# Altium PCB PCB2.PcbDoc
Units mil, origin at the board's own origin, x right, y up, seen from the top; angles counter-clockwise.
Board outline 1745 x 1445 mil, 2 copper layers (Top Layer, Bottom Layer); 19 components, 14 nets, 73 pads, 16 vias.
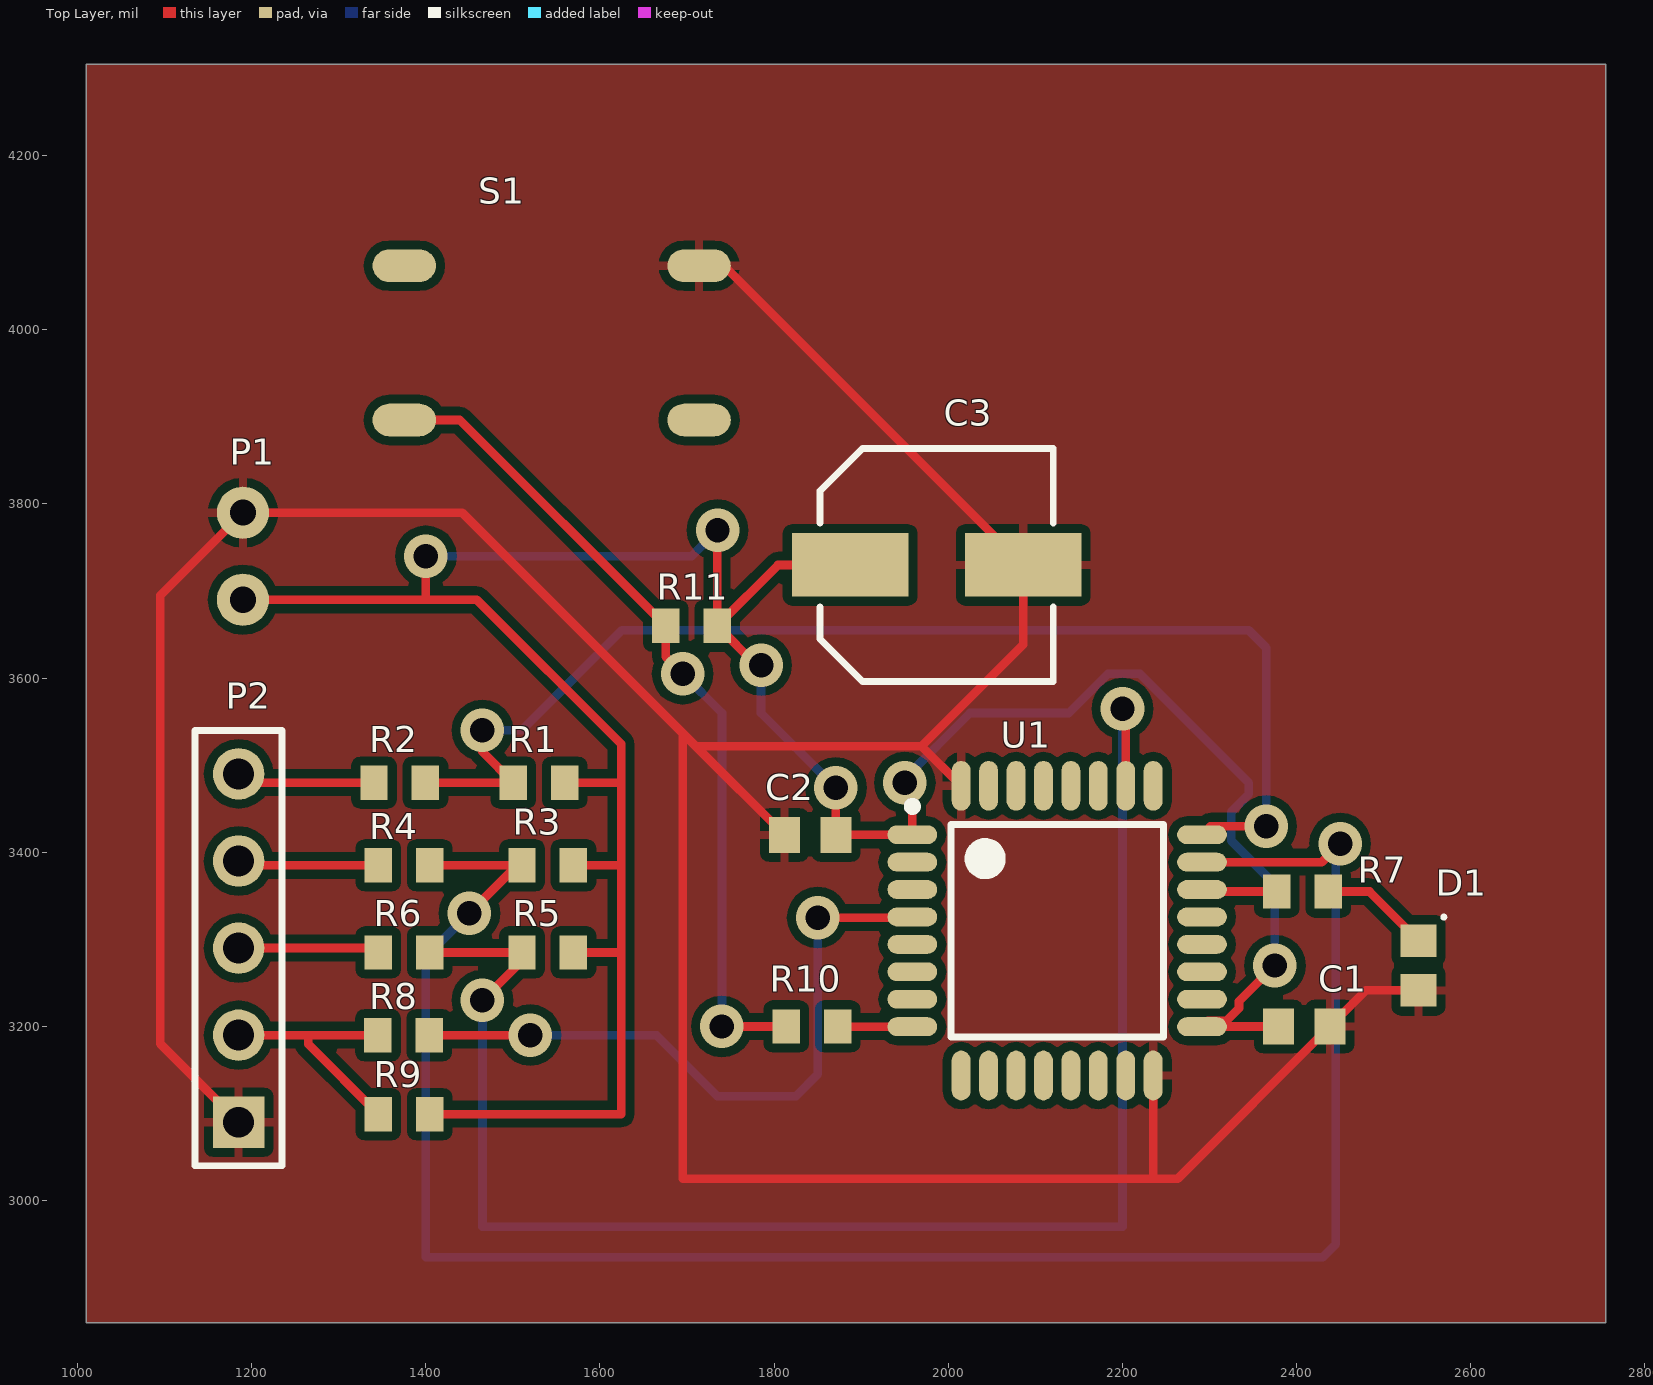
[diagram p0: Top Layer view]
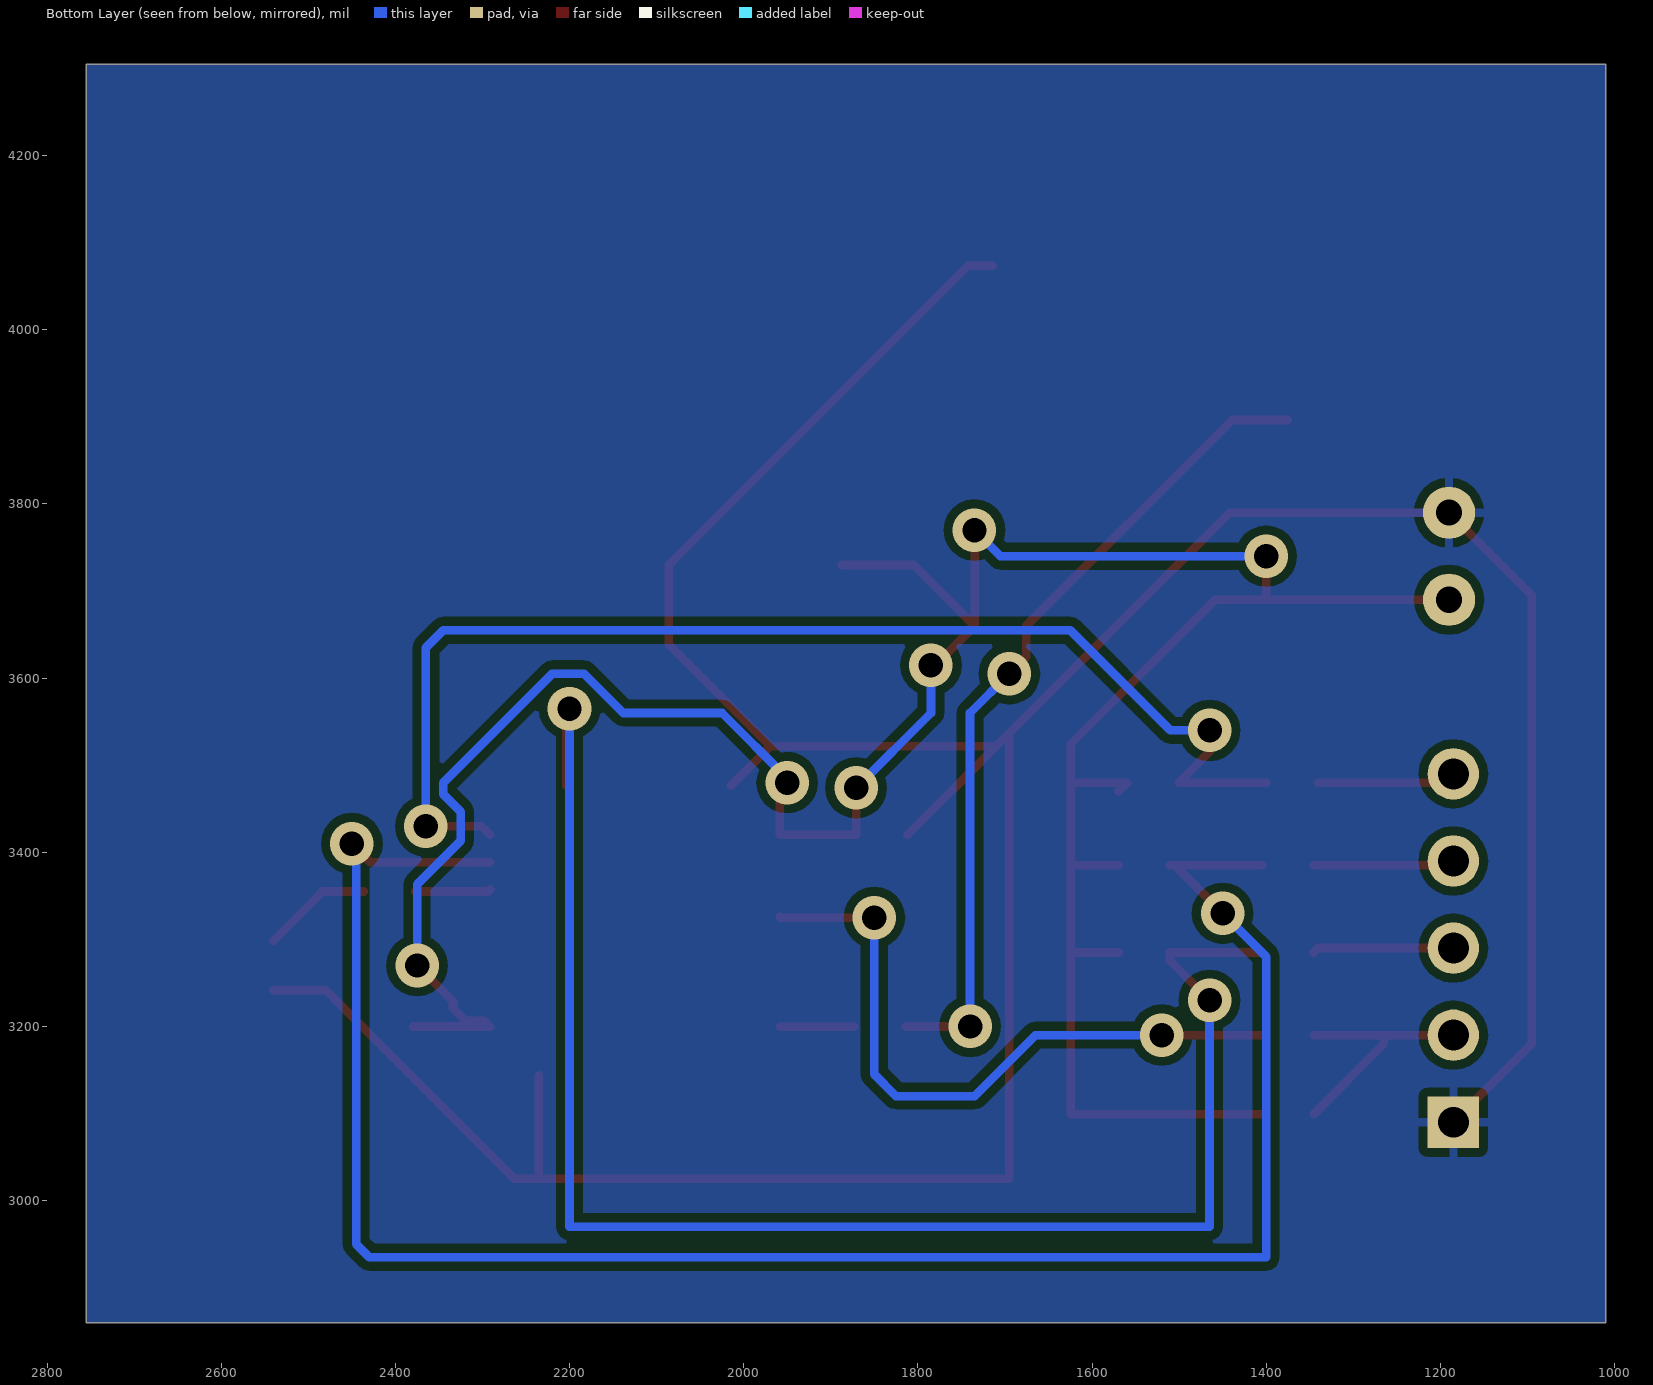
[diagram p1: Bottom Layer view, seen from below]

## Layer stack, top to bottom
Top Solder: solder mask 0.4, Solder Resist, Dk 3.5
Top Layer: signal copper 1.4
Dielectric 1: dielectric 12.6, FR-4, Dk 4.8
Bottom Layer: signal copper 1.4
Bottom Solder: solder mask 0.4, Solder Resist, Dk 3.5

## Board outline
1010,2860 1010,4305 2755,4305 2755,2860

## Design rules (kind name [scope] priority, off if disabled: settings)
Clearance [All] p1: gap=10 ignorepadtopadclearanceinfootprint=FALSE except(0: Arc-Hole Track-Hole SMDPad-Hole THPad-Hole Via-Hole Fill-Hole Poly-Hole Region-Hole Text-Hole; 9: Arc-SMDPad Track-SMDPad SMDPad-SMDPad)
PolygonConnect [All] p1: connectstyle=Relief reliefconductorwidth=10 reliefentries=4 polygonreliefangle="90 Angle" airgapwidth=10
RoomDefinition Sheet2 [InComponentClass('Sheet2')] p1: confinementstyle=ConfineOut formatcopy=TRUE lockcomponents=FALSE outline 0,0 2000,0 2000,1000 0,1000
RoutingVias [All] p1: holewidth=28 width=50 viastyle="Through Hole" minholewidth=28 minwidth=50 maxholewidth=28 maxwidth=50
SolderMaskExpansion [All] p1: expansion=4
Width [All] p1: maxlimit=10 minlimit=10 preferedwidth=10
30 further rules are at their usual default settings.

## Components (designator, comment, footprint, x,y, rotation, side; value= is the part's Value field where it differs from the comment)
C1 "100nF" capacitor0603nopolar 2408.63,3200 r180 top
C2 "100nF" capacitor0603nopolar 1841.37,3420 r0 top
C3 "Cap 10uF" cappolar_CM1H106M6L006VR 1986.66,3730 r0 top
D1 "LED-YEL-GRN" diode0603 2540,3270 r270 top
P1 "Header 2" header2,54 1190,3690 r0 top
P2 "Header 5" HDR1X5 1185,3090 r90 top
R1 "10kΩ" resistor0603 1530,3480 r0 top
R2 "100Ω" resistor0603 1370,3480 r0 top
R3 "10kΩ" resistor0603 1540,3385 r0 top
R4 "100Ω" resistor0603 1375,3385 r0 top
R5 "10kΩ" resistor0603 1540,3285 r0 top
R6 "100Ω" resistor0603 1375,3285 r0 top
R7 "604Ω" resistor0603 2406.66,3355 r0 top
R8 "100Ω" resistor0603 1374.53,3190 r0 top
R9 "10kΩ" resistor0603 1375,3099.28 r0 top
R10 "100Ω" resistor0603 1843.34,3200 r0 top
R11 "10kΩ" resistor0603 1705,3660 r0 top
S1 "SW-SPST" switch 1544.57,3985 r180 top
U1 "STM32F303K8T6" STM32F303K8T6 2125,3310 r0 top

## Footprints (in the part's own frame and the unit in brackets; to place one, negate y for a bottom-side part, rotate by r counter-clockwise, add the part's x,y. Pads: shape width x height; smd on the part's side, far side on the other; paste and mask are expansions set on the pad)
capacitor0603nopolar [mm]
  rect 0.9x1.05 smd: 1(-0.75,0) 2(0.75,0)
  body extent -0.85,-0.45 0.85,0.45, height 0.87
cappolar_CM1H106M6L006VR [mm]
  rect 3.4x1.85 smd: 1(-2.525,0) 2(2.525,0)
  silkscreen extent -3.4,-3.4 3.4,3.4, body extent -3.4,-3.4 3.4,3.4, height 6.3
diode0603 [mm]
  rect 0.95x1.05 smd: 1(-0.725,0) 2(0.725,0)
  silkscreen extent -1.46,0.69 -1.36,0.79, body extent -0.9,-0.45 0.9,0.45, height 1
HDR1X5 [mm] "Connector; Header; 5 Position"
  rect 1.5x1.5 hole 0.9: 1(0,0)
  round 1.5 hole 0.9: 2(2.54,0) 3(5.08,0) 4(7.62,0) 5(10.16,0)
  silkscreen extent -1.27,-1.27 11.43,1.27
header2,54 [mil]
  round 60 hole 30: 1(0,100) 2(0,0)
resistor0603 [mm]
  rect 0.8x1 smd: 1(-0.75,0) 2(0.75,0)
  body extent -0.85,-0.45 0.85,0.45, height 0.6
STM32F303K8T6 [mm] "TQFP, 32-Leads, Body 7,00x7,00mm, Pitch 0,80mm, IPC Medium Density"
  oval 1.45x0.55 smd: 1(-4.225,2.8) 2(-4.225,2) 3(-4.225,1.2) 4(-4.225,0.4) 5(-4.225,-0.4) 6(-4.225,-1.2) 7(-4.225,-2) 8(-4.225,-2.8) 17(4.225,-2.8) 18(4.225,-2) 19(4.225,-1.2) 20(4.225,-0.4) 21(4.225,0.4) 22(4.225,1.2) 23(4.225,2) 24(4.225,2.8)
  oval 0.55x1.45 smd: 9(-2.8,-4.225) 10(-2,-4.225) 11(-1.2,-4.225) 12(-0.4,-4.225) 13(0.4,-4.225) 14(1.2,-4.225) 15(2,-4.225) 16(2.8,-4.225) 25(2.8,4.225) 26(2,4.225) 27(1.2,4.225) 28(0.4,4.225) 29(-0.4,4.225) 30(-1.2,4.225) 31(-2,4.225) 32(-2.8,4.225)
  silkscreen extent -4.35,-3.1 3.1,3.75, body extent -3.5,-3.5 3.5,3.5, height 1.6
switch [mm]
  oval 1.85x0.95 smd: 1(-4.3,2.25) 2(-4.3,-2.25) 3(4.3,-2.25) 4(4.3,2.25)
  body extent -3.25,-3.25 3.25,3.25, height 4.6

## Part data
C1 C2: library part "Cap 100nF", "Capacitor", Manufacturer=WALSIN, Manufacturer symbol=0603B104K101CT, Package=0603, Temperature=-55...125°C, Tolerance=±10%, Voltage=100V, Supplier=tme.pl, Supplier symbol=0603B104K101CT
C3: "Capacitor", Capacity=10µF, Manufacturer=SAMWHA, Manufacturer symbol=CM1H106M6L006VR, Temperature=-55...105°C, Tolerance=±20%, Voltage=50V, Size=O6,3x5,8mm, Supplier=tme.pl, Supplier symbol=CM1H106M6L006VR
D1: "Typical INFRARED GaAs LED", Color=¿ó³to-zielony, Current=20mA, Manufacturer=EVERLIGHT, Manufacturer symbol=19-21SYGC/S530-E1/4T, Package=0603, Voltage=1,7...2,4V, Supplier=tme.pl, Supplier symbol=19-21SYGC/S530-E1
P1: "Header, 2-Pin", Manufacturer="TE CONNECTIVITY", Manufacturer symbol=825433-2, Montage=THT, Orientation=Straight, Pins=2, Supplier=tme.pl, Supplier symbol=825433-2, Type=Male
P2: "Header, 5-Pin", LatestRevisionDate=17-Jul-2002, LatestRevisionNote="Re-released for DXP Platform.", Publisher="Altium Limited"
R1 R3 R5 R9 R11: library part "Resistor 10Kohm", "Resistor", Manufacturer="ROYAL OHM", Manufacturer symbol=HP03W5F1002T5E, Package=0603, Resistance=10k?, Temperature=-55...155°C, Tolerance=±1%, Voltage=50V, Montage=SMD, Supplier=tme.pl, Supplier symbol=HP03-10K1%, Type="thick film"
R2 R4 R6 R8 R10: library part "Resistor 604ohm", "Resistor", Manufacturer=WALSIN, Manufacturer symbol=WR06X6040FTL, Package=0603, Resistance=100?, Temperature=-55...155°C, Tolerance=±1%, Voltage=75V, Montage=SMD, Supplier=tme.pl, Supplier symbol=WR06X6040FTL, Type="thick film"
R7: library part "Resistor 604ohm", "Resistor", Manufacturer=WALSIN, Manufacturer symbol=WR06X6040FTL, Package=0603, Resistance=250?, Temperature=-55...155°C, Tolerance=±1%, Voltage=75V, Montage=SMD, Supplier=tme.pl, Supplier symbol=WR06X6040FTL, Type="thick film"
S1: "Single-Pole, Single-Throw Switch", Manufacturer="NKK SWITCHES", Manufacturer symbol=HP0315AFKP2-S, Temperature=-20...70°C, Dimensions=6,2x6,2x4,4mm, Height=4,4mm, Supplier=tme.pl, Supplier symbol=HP0315AFKP2-S
U1: "Microchip", Frequency=72MHz, Manufacturer=STMicroelectronics, Package=LQFP32, Temperature=-40...85°C, Architecture="Cortex M4", I/O=10, Manufacturer symbol=STM32F303K8T6, Montage=SMD, Supplier=tme.eu, Supplier symbol=STM32F303K8T6, Type="mikrokontroler ARM"

## Via types
v1: diameter 50, hole 28, Top Layer to Bottom Layer, 16 vias

## Nets (pads, with @x,y where several pads share a name; then routed paths per layer and width w, separated by ;. In a path a pad name is that pad's centre, name@x,y a point inside that pad or via, vN(x,y) a via of type N, cw(c..) or ccw(c..) an arc to the next point about the centre after c; other vN are vias at no path point)
+3V3: C1.2 C2.2 C3.1 P1.2 R1.2 R3.2 R5.2 R9.2 R11.2 U1.1 U1.17 | length 3421.7
  Top Layer w10: P1.2 1400,3690 ; v1(1400,3740) 1400,3690 ; R9.2 1624.28,3099.28 1624.28,3285 ; R5.2 1624.28,3285 ; R3.2 1624.28,3385 ; R1.2@1569.53,3470 R1.2 1624.28,3480 ; v1(1735,3770) 1734.53,3769.53 R11.2 ; v1(1785,3615) 1779.53,3615 R11.2 ; v1(1870.9,3474.1) C2.2 1958.43,3420 U1.1 1958.66,3471.34 v1(1950,3480) ; C3.1 1804.53,3730 R11.2 ; U1.17 U1.17@2291.57,3200 ; v1(2375,3270) 2333.88,3228.88 2333.88,3220.98 2319.34,3206.43 2298.01,3206.43 U1.17@2291.57,3200 ; C1.2 U1.17@2291.57,3200 ; 1400,3690 1458.56,3690 1624.28,3524.28 1624.28,3480 ; 1624.28,3285 1624.28,3385 ; 1624.28,3385 1624.28,3480
  Bottom Layer w10: v1(1400,3740) 1705,3740 v1(1735,3770) ; v1(1785,3615) 1785,3560 v1(1870.9,3474.1) ; v1(1950,3480) 1950,3485 2025,3560 2138.43,3560 2183.43,3605 2220,3605 2345,3480 2345,3466.57 2325,3446.57 2325,3413.43 2375,3363.43 v1(2375,3270)
GND: C1.1 C2.1 C3.2 D1.2 P1.1 P2.1 S1.2 U1.16 U1.32 | length 4211
  Top Layer w10: P2.1 1095,3180 1095,3695 P1.1 1441.84,3790 1695,3536.84 ; S1.2 1742.49,4073.58 C3.2 2086.07,3638.65 1969.26,3521.84 ; C2.1 1710,3521.84 ; U1.32 1969.26,3521.84 ; U1.16 2235.24,3025.24 ; D1.2 2479.62,3241.46 C1.1 2263.4,3025.24 2235.24,3025.24 ; 1695,3536.84 1695,3025.24 2235.24,3025.24 ; 1695,3536.84 1710,3521.84 ; 1710,3521.84 1969.26,3521.84
NetD1_1: D1.1 R7.2 | length 127.2
  Top Layer w10: R7.2 2483.54,3355 D1.1
NetP2_2: P2.2 R8.1 R9.1 | length 284.1
  Top Layer w10: P2.2 1265,3190 ; R8.1 1265,3190 ; R9.1 1265,3179.75 1265,3190
NetP2_3: P2.3 R6.1 | length 162.5
  Top Layer w10: P2.3 1340.47,3290 R6.1
NetP2_4: P2.4 R4.1 | length 162.5
  Top Layer w10: P2.4 1190,3385 R4.1
NetP2_5: P2.5 R2.1 | length 159.6
  Top Layer w10: P2.5 1195,3480 R2.1
NetR1_1: R1.1 R2.2 U1.24 | length 1414.3
  Top Layer w10: R2.2 R1.1 1465,3515.47 v1(1465,3540) ; U1.24 2301.1,3430 v1(2365,3430)
  Bottom Layer w10: v1(1465,3540) 1510,3540 1625,3655 2345,3655 2365,3635 v1(2365,3430)
NetR3_1: R3.1 R4.2 U1.23 | length 2280.2
  Top Layer w10: R4.2 R3.1@1505,3385 ; v1(1450,3330) R3.1@1505,3385 ; R3.1 R3.1@1505,3385 ; U1.23 2291.39,3388.69 2428.69,3388.69 v1(2450,3410)
  Bottom Layer w10: v1(1450,3330) 1400,3280 1400,2935 2430,2935 2445,2950 2445,3405 v1(2450,3410)
NetR5_1: R5.1 R6.2 U1.26 | length 1860
  Top Layer w10: R6.2 R5.1 1510.47,3275.47 v1(1465,3230) ; v1(2200,3565) 2203.74,3561.26 U1.26
  Bottom Layer w10: v1(1465,3230) 1465,2970 2200,2970 v1(2200,3565)
NetR7_1: R7.1 U1.22 | length 86.7
  Top Layer w10: U1.22 2293.58,3355 R7.1
NetR8_2: R8.2 U1.4 | length 774.3
  Top Layer w10: R8.2 v1(1520,3190) ; v1(1850,3325) 1957.91,3325 U1.4
  Bottom Layer w10: v1(1520,3190) 1665,3190 1735,3120 1825,3120 1850,3145 v1(1850,3325)
NetR10_1: R10.1 R11.1 S1.4 | length 958.7
  Top Layer w10: S1.4 1439.06,3896.42 R11.1 1675.47,3624.53 v1(1695,3605) ; v1(1740,3200) R10.1
  Bottom Layer w10: v1(1695,3605) 1740,3560 v1(1740,3200)
NetR10_2: R10.2 U1.8 | length 85.9
  Top Layer w10: R10.2 1873.1,3199.76 U1.8
pads on no net: S1.1 S1.3 U1.2 U1.3 U1.5 U1.6 U1.7 U1.9 U1.10 U1.11 U1.12 U1.13 U1.14 U1.15 U1.18 U1.19 U1.20 U1.21 U1.25 U1.27 U1.28 U1.29 U1.30 U1.31

## Polygon pours and split planes (outlines as drawn)
GND on Top Layer "Top Layer-No Net" (solid, pour order 1): 1010,2860 1010,4305 2755,4305 2755,2860
GND on Bottom Layer "Top Layer-No Net1" (solid, pour order 2): 1010,2860 1010,4305 2755,4305 2755,2860

## Silkscreen, mask and mechanical layers (free items; w line width, h text height)
Mechanical 1:
  the board outline again, w5